# Altium PCB pcb.PcbDoc
Units mm, origin at the board's own origin, x right, y up, seen from the top; angles counter-clockwise.
Board outline 37.5 x 37.5 mm, 2 copper layers (Top Layer, Bottom Layer); 65 components, 72 nets, 249 pads, 78 vias.
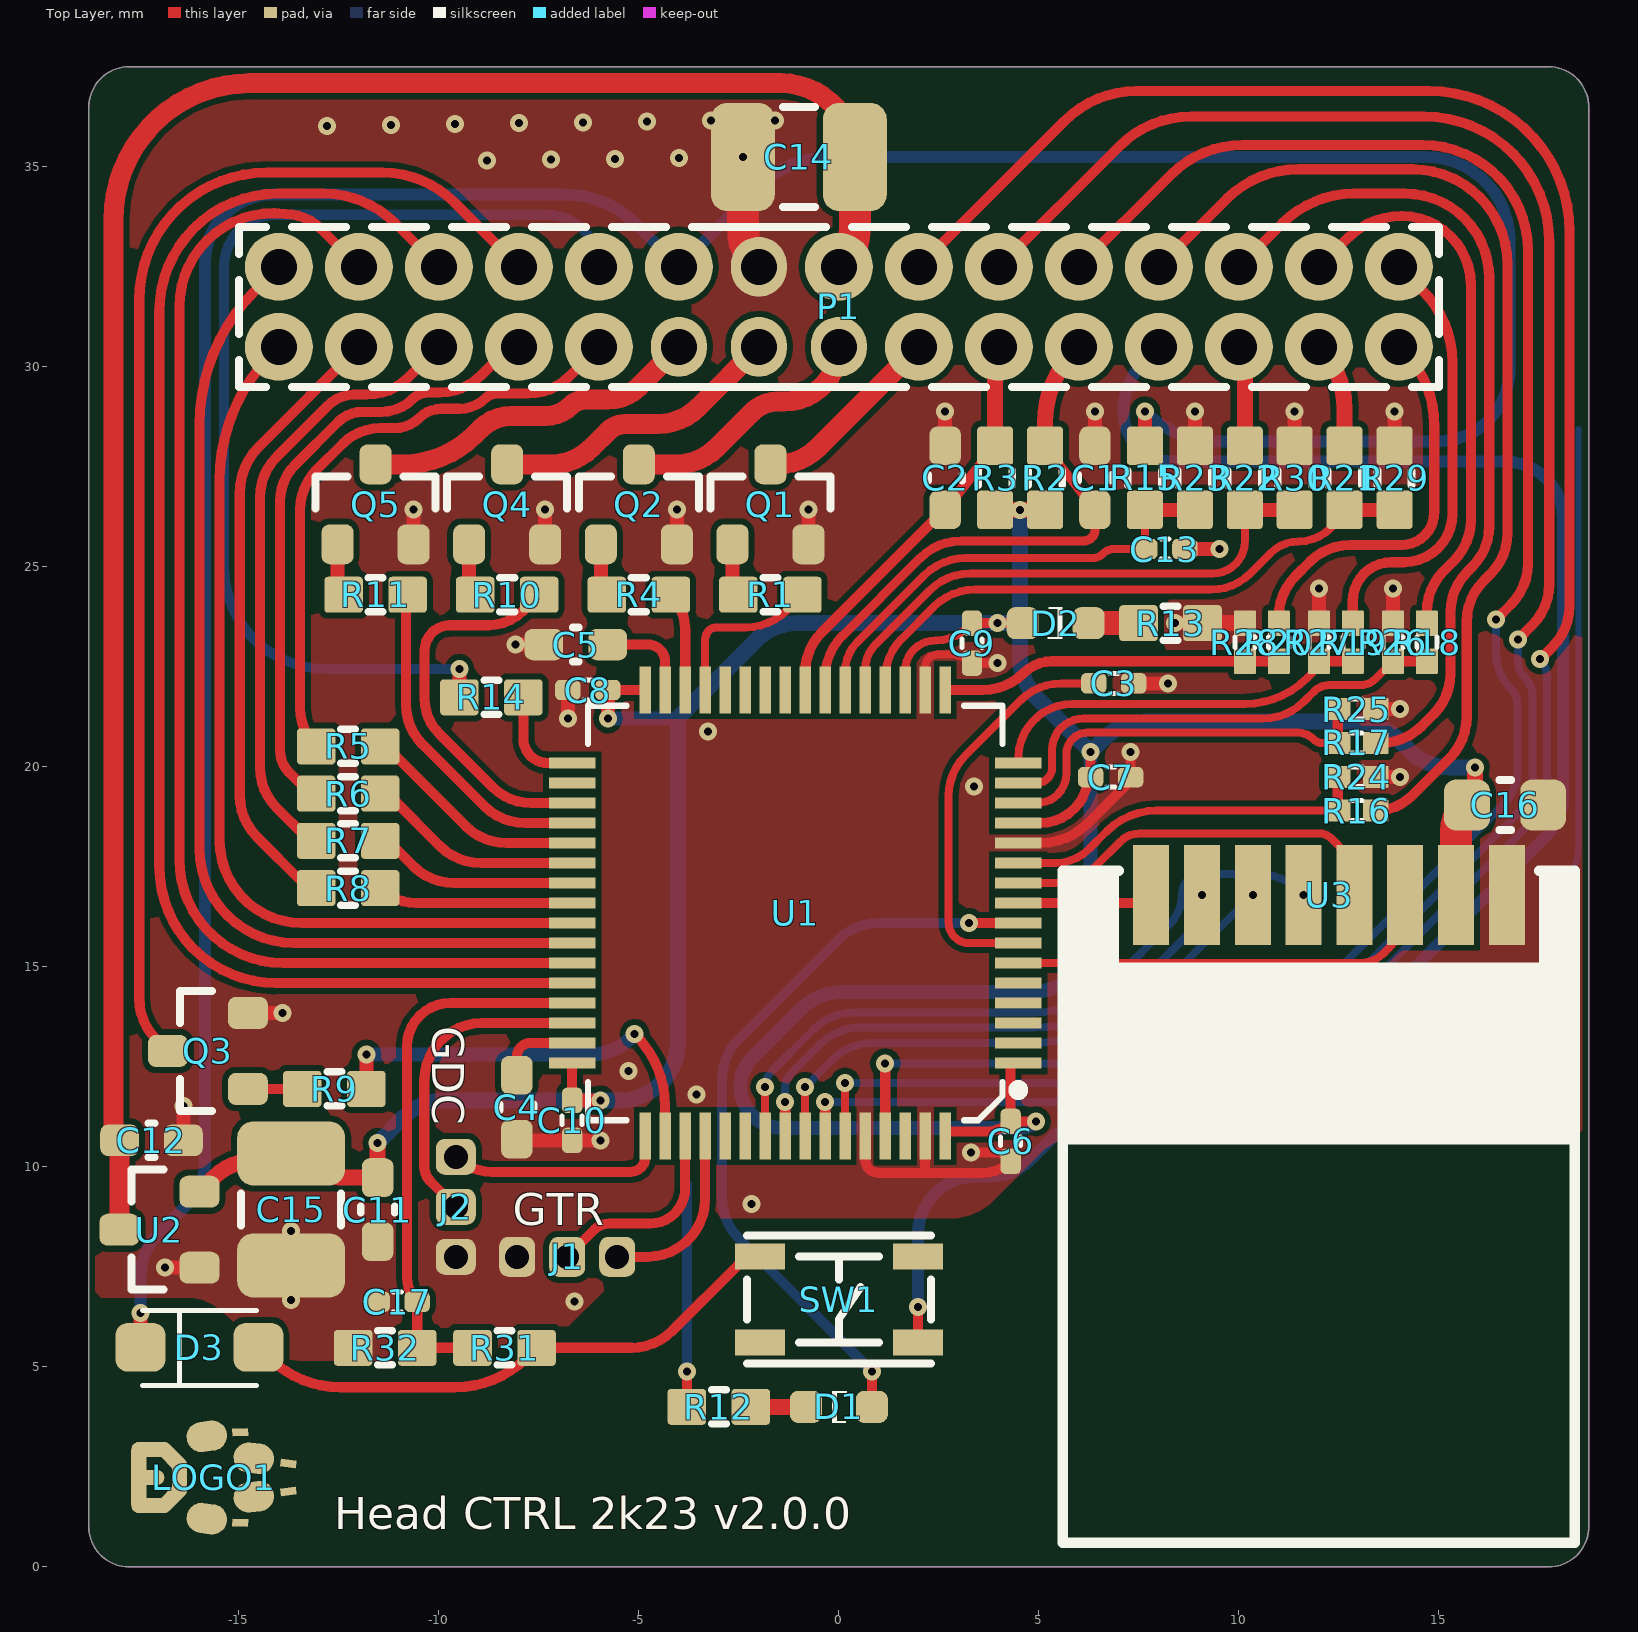
[diagram p0: Top Layer view]
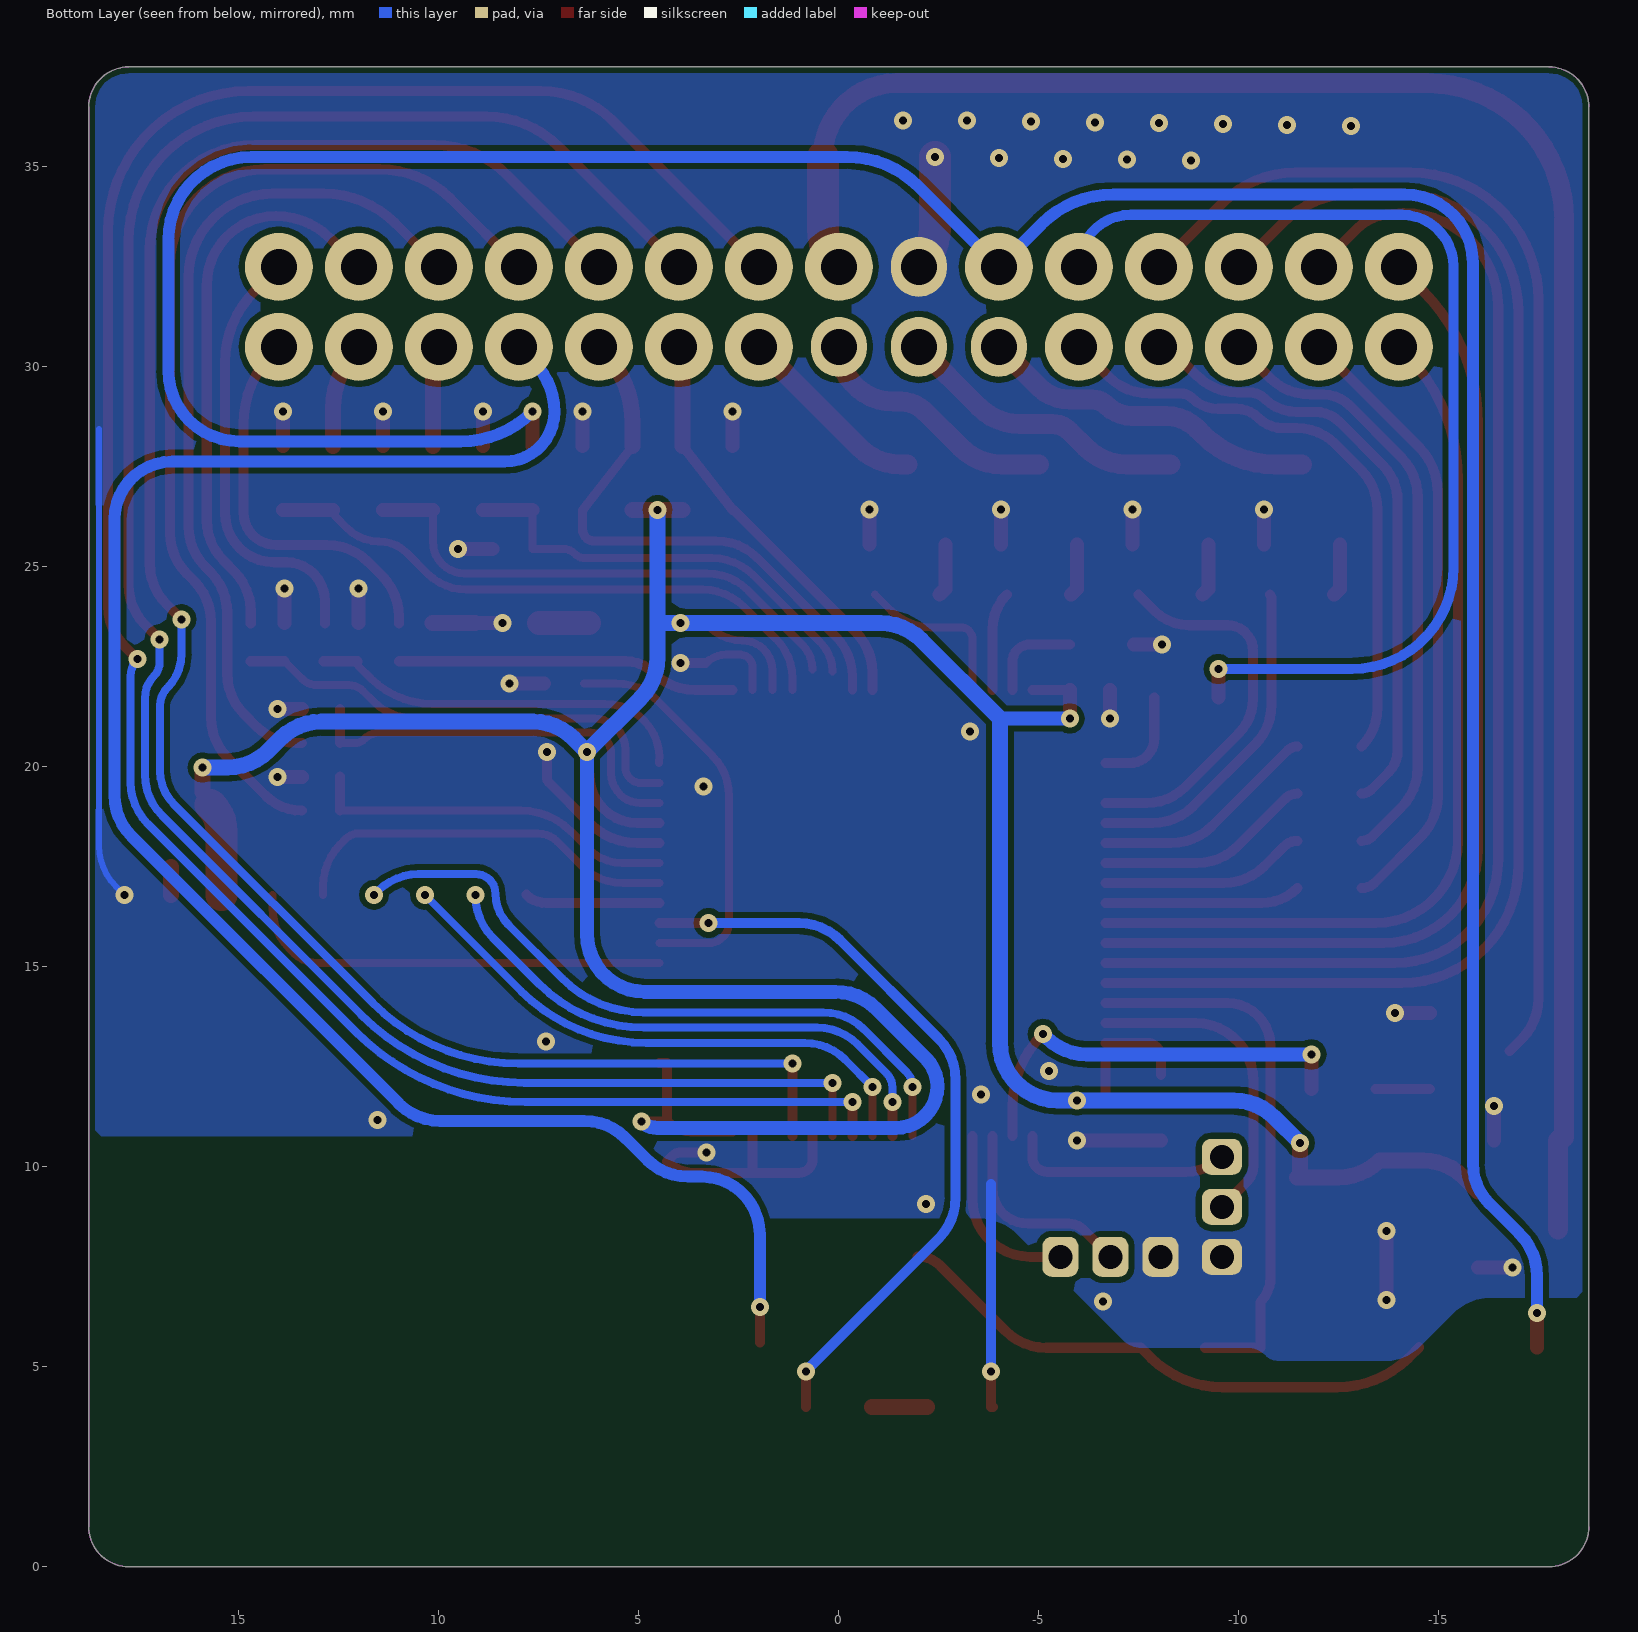
[diagram p1: Bottom Layer view, seen from below]
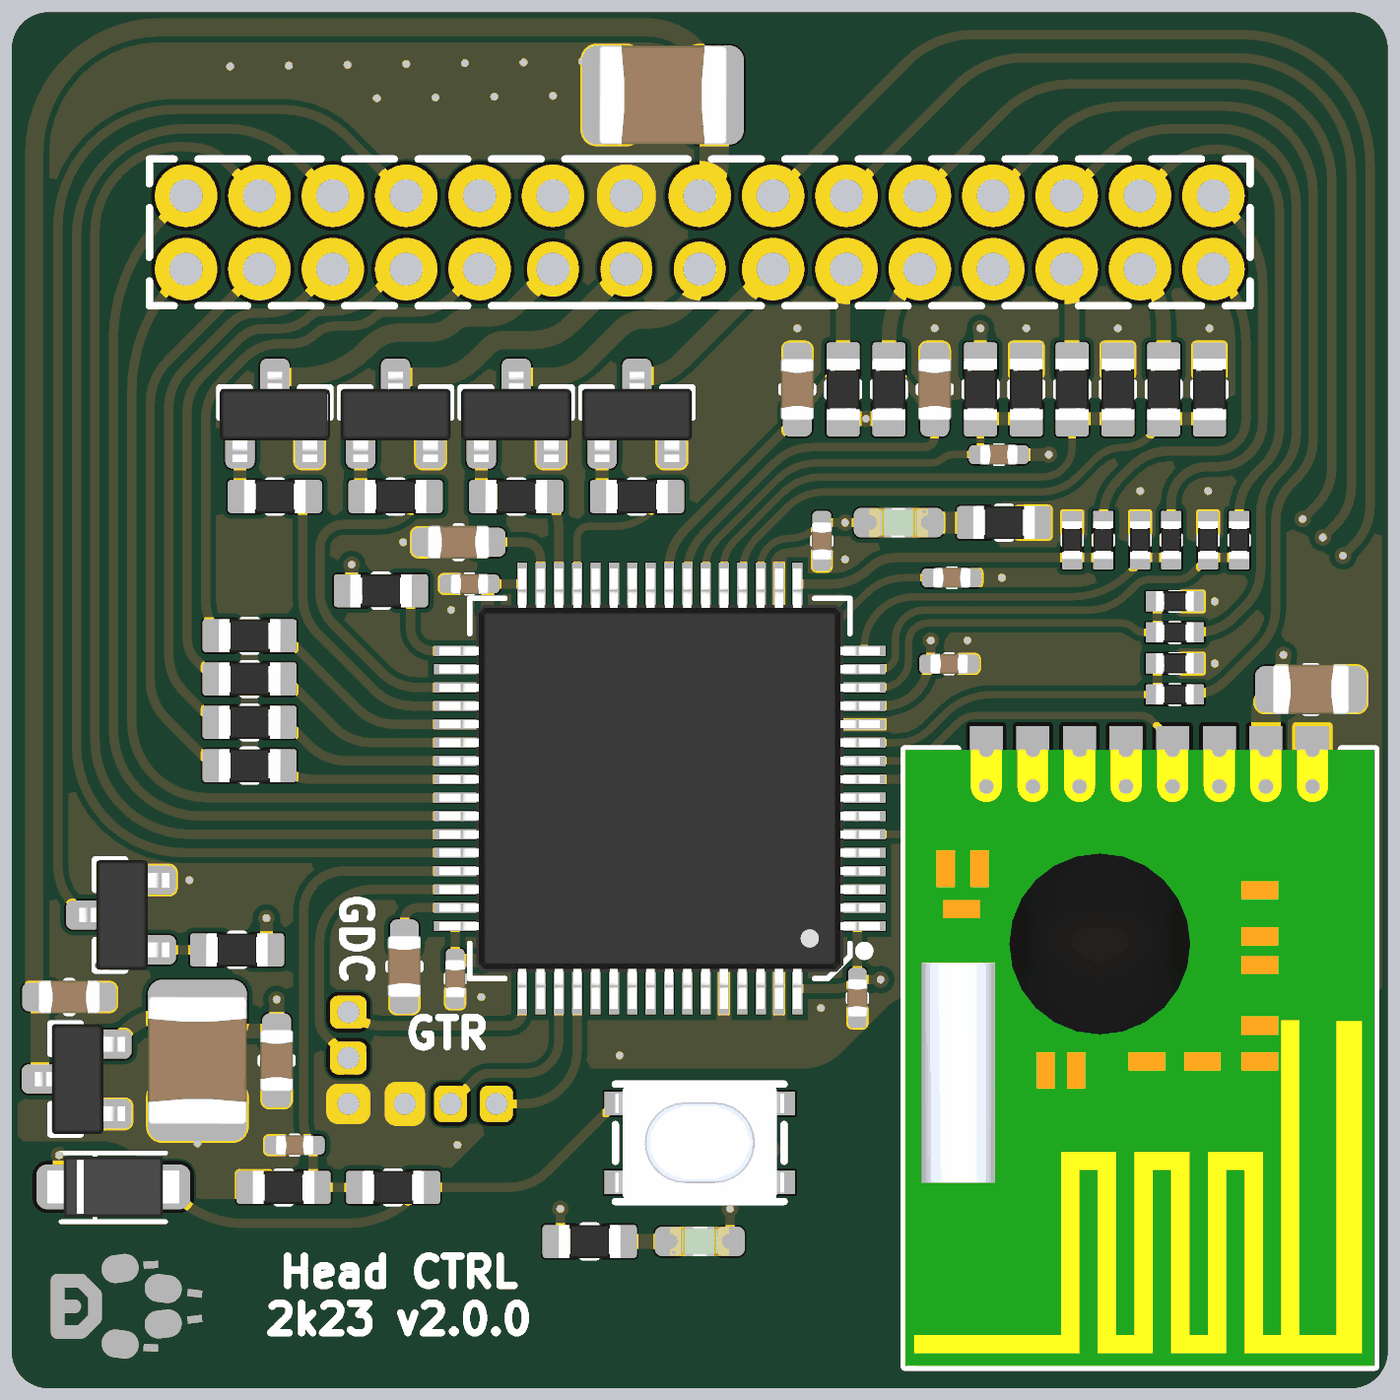
[diagram p2: 3D render of the assembled board from above, using the file's embedded part models]

## Layer stack, top to bottom
Top Solder: solder mask 0.0102, Solder Resist, Dk 3.5
Top Layer: signal copper 0.0356
Dielectric 1: dielectric 0.32, FR-4, Dk 4.8
Bottom Layer: signal copper 0.0356
Bottom Solder: solder mask 0.0102, Solder Resist, Dk 3.5

## Board outline
-18.75,1 ccw(c-17.75,1) -17.75,0 17.749,0 ccw(c17.749,1) 18.75,1 18.75,36.499 ccw(c17.749,36.499) 17.749,37.499 -17.75,37.5 -17.75,37.499 ccw(c-17.75,36.499) -18.75,36.499

## Design rules (kind name [scope] priority, off if disabled: settings)
Clearance Clearance_1 [InNet('ANT')] p1: gap=0.203 ignorepadtopadclearanceinfootprint=FALSE except(0.7: Arc-Fill Arc-Poly Arc-Region Track-Fill Track-Poly Track-Region SMDPad-Fill SMDPad-Poly SMDPad-Region THPad-Fill THPad-Poly THPad-Region Via-Fill Via-Poly Via-Region Fill-Fill Fill-Poly Fill-Region Poly-Poly Poly-Region Region-Region)
Clearance [All] p2: gap=0.15 ignorepadtopadclearanceinfootprint=FALSE
MinimumSolderMaskSliver [All] p1 off: minsoldermaskwidth=0.254
PolygonConnect [All] p1: connectstyle=Direct reliefconductorwidth=0.254 reliefentries=4 polygonreliefangle="90 Angle" airgapwidth=0.254
RoutingVias [All] p1 off: holewidth=0.711 width=1.27 viastyle="Through Hole" minholewidth=0.711 minwidth=1.27 maxholewidth=0.711 maxwidth=1.27
SilkToSolderMaskClearance [IsPad] p1 off: minsilkscreentomaskgap=0.254 clearancetoexposedcopper=TRUE
SolderMaskExpansion [All] p1: expansion=0.102 istentingtop=FALSE
Width [All] p1: maxlimit=12.7 minlimit=0.051 preferedwidth=0.254
28 further rules are at their usual default settings.

## Components (designator, comment, footprint, x,y, rotation, side; value= is the part's Value field where it differs from the comment)
C1 "100n" C0603 6.404,27.223 r270 top
C2 "100n" C0603 2.66,27.223 r270 top
C3 "100n" C0402 6.87,22.088 r180 top
C4 "2.2u" C0603 -8.05,11.493 r90 top
C5 "2.2u" C0603 -6.574,23.057 r0 top
C6 "100n" C0402 4.297,10.637 r90 top
C7 "100n" C0402 6.797,19.742 r180 top
C8 "100n" C0402 -6.274,21.92 r0 top
C9 "100n" C0402 3.327,23.091 r90 top
C10 "100n" C0402 -6.665,11.161 r90 top
C11 "1u" C0603 -11.53,8.932 r90 top
C12 "1u" C0603 -17.183,10.662 r180 top
C13 "100n" C0402 8.152,25.445 r180 top
C14 "1u" C1210 -1,35.246 r0 top
C15 "10u" C1210 -13.691,8.935 r90 top
C16 "10uF" C0805 16.657,19.046 r180 top
C17 "100n" C0402 -11.041,6.623 r0 top
D1 "GRN" LED-0603-GRN 0,4 r0 top
D2 "GRN" LED-0603-GRN 5.422,23.591 r180 top
D3 "DS1M" SOD-123FL -15.983,5.488 r180 top
J1 "UART" HDR-1x3-P1.25 -6.79,7.75 r180 top
J2 "SWD" HDR-1x3-P1.25 -9.576,9 r270 top
LOGO1 "LOGO" LOGO -17.5,2.233 r270 top
P1 "Header 15X2" HDR2X15-2mm 0,31.5 r180 top
Q1 "IRLML2502" SOT-23 -1.711,26.563 r270 top
Q2 "IRLML2502" SOT-23 -5.001,26.563 r270 top
Q3 "IRLML2502" SOT-23 -15.773,12.897 r0 top
Q4 "IRLML2502" SOT-23 -8.29,26.563 r270 top
Q5 "IRLML2502" SOT-23 -11.58,26.563 r270 top
R1 "1k" R0603 -1.711,24.302 r0 top
R2 "10k" R0603 5.156,27.223 r270 top
R3 "10k" R0603 3.908,27.223 r270 top
R4 "1k" R0603 -5.001,24.302 r0 top
R5 "10k" R0603 -12.268,20.51 r180 top
R6 "10k" R0603 -12.268,19.33 r180 top
R7 "10k" R0603 -12.268,18.149 r180 top
R8 "10k" R0603 -12.268,16.969 r180 top
R9 "1k" R0603 -12.611,11.947 r0 top
R10 "1k" R0603 -8.29,24.302 r0 top
R11 "1k" R0603 -11.58,24.302 r0 top
R12 "330" R0603 -3,4 r0 top
R13 "1k" R0603 8.293,23.591 r180 top
R14 "1k" R0603 -8.687,21.736 r180 top
R15 "47k" R0603 7.652,27.223 r90 top
R16 "47k" R0402 12.949,18.905 r0 top
R17 "47k" R0402 12.949,20.597 r0 top
R18 "47k" R0402 14.7,23.115 r90 top
R19 "47k" R0402 12.849,23.115 r90 top
R20 "47k" R0402 10.999,23.115 r90 top
R21 "47k" R0603 12.645,27.223 r90 top
R22 "47k" R0603 10.148,27.223 r90 top
R23 "10k" R0603 8.9,27.223 r270 top
R24 "10k" R0402 12.949,19.751 r180 top
R25 "10k" R0402 12.949,21.443 r180 top
R26 "10k" R0402 13.854,23.115 r270 top
R27 "10k" R0402 12.003,23.115 r270 top
R28 "10k" R0402 10.152,23.115 r270 top
R29 "10k" R0603 13.893,27.223 r270 top
R30 "10k" R0603 11.397,27.223 r270 top
R31 "30k" R0603 -8.357,5.475 r0 top
R32 "22k" R0603 -11.341,5.475 r0 top
SW1 "PTS810SJS250" BTN_PTS810 0,6.686 r0 top
U1 "STM32F405RGT6" LQFP-64 -1.09,16.345 r90 top
U2 "XC6206P332MR" SOT-23 -16.983,8.427 r0 top
U3 "RFM75" RFM75 12,9 r180 top

## Footprints (in the part's own frame and the unit in brackets; to place one, negate y for a bottom-side part, rotate by r counter-clockwise, add the part's x,y. Pads: shape width x height; smd on the part's side, far side on the other; paste and mask are expansions set on the pad)
BTN_PTS810 [mm]
  rect 1.25x0.65 smd mask+0.05: 1(-1.975,1.075) 2(1.975,1.075) 3(-1.975,-1.075) 4(1.975,-1.075)
  silkscreen extent -2.3,-1.6 2.3,1.6, body extent -2.3,-1.6 2.3,1.6, height 2.5
C0402 [mm] "Chip Capacitor Body"
  rrect50% 0.635x0.508 smd mask+0.05: 1(-0.5,0) 2(0.5,0)
  silkscreen extent -0.1,-0.25 0.1,0.25, body extent -0.52,-0.27 0.53,0.28, height 0.55
C0603 [mil] "Chip Capacitor"
  rrect50% 38x31 smd mask+1.97: 1(-31.5,0) 2(31.5,0)
  silkscreen extent -3,-17 3,17, body extent -33,-18 33,18, height 35
C0805 [mil] "Chip Capacitor"
  rrect50% 45x50 smd mask+1.97: 1(-37.5,0) 2(37.5,0)
  silkscreen extent -6,-25 6,25, body extent -41,-27 41,27, height 53
C1210 [mm] "Chip Capacitor"
  rrect50% 1.6x2.7 smd mask+0.05: 1(-1.4,0) 2(1.4,0)
  silkscreen extent -0.4,-1.25 0.4,1.25, body extent -1.75,-1.35 1.75,1.35, height 1.8
HDR2X15-2mm [mm] "Connector; Header; 30x2 Position"
  round 1.7 hole 0.9: 1(-14,-1) 2(-14,1) 3(-12,-1) 4(-12,1) 5(-10,-1) 6(-10,1) 7(-8,-1) 8(-8,1) 9(-6,-1) 10(-6,1) 11(-4,-1) 12(-4,1) 13(-2,-1) 14(-2,1) 15(0,-1) 19(4,-1) 21(6,-1) 22(6,1) 23(8,-1) 24(8,1) 25(10,-1) 26(10,1) 27(12,-1) 28(12,1) 29(14,-1) 30(14,1)
  oval 1.4x1.5 hole 0.9: 16(0,1) 17(2,-1) 18(2,1) 20(4,1)
  silkscreen extent -15,-2 15,2
HDR-1x3-P1.25 [mm]
  rrect50% 0.9x1 hole 0.6: 1(-1.25,0) 2(0,0) 3(1.25,0)
LED-0603-GRN [mm]
  rrect50% 0.8x0.8 smd mask+0.05: 1(0.825,0) 2(-0.825,0)
  silkscreen extent -0.18,-0.4 0.2,0.4, body extent -0.8,-0.4 0.8,0.4, height 0.6
LOGO [mil]
  rect 15.75x7.87 smd rot 93 mask+4: ""(-44.55,100)
  oval 30x40 smd rot 8 mask+4: ""(-40.55,67)
  oval 15x39.5 smd mask+4: ""(-27.5,12.5) ""(27.5,12.5)
  oval 15x36.21 smd rot 135 mask+4: ""(-20,32.5)
  oval 30x40 smd rot 173 mask+4: ""(-18.99,113.27)
  rect 15.75x7.87 smd rot 83 mask+4: ""(-13.91,147.15)
  oval 39.5x15 smd mask+4: ""(0,40)
  oval 15x32.5 smd mask+4: ""(0,9)
  oval 70x15 smd mask+4: ""(0,0)
  rect 15.75x7.87 smd rot 97 mask+4: ""(13.91,147.15)
  oval 30x40 smd rot 7 mask+4: ""(18.99,113.27)
  oval 15x36.21 smd rot 45 mask+4: ""(20,32.5)
  oval 30x40 smd rot 172 mask+4: ""(40.55,67)
  rect 15.75x7.87 smd rot 87 mask+4: ""(44.55,100)
LQFP-64 [mil]
  rect 11x46 smd mask+0.98: 1(-147.64,-219.5) 2(-127.95,-219.5) 3(-108.27,-219.5) 4(-88.58,-219.5) 5(-68.9,-219.5) 6(-49.21,-219.5) 7(-29.53,-219.5) 8(-9.84,-219.5) 9(9.84,-219.5) 10(29.53,-219.5) 11(49.21,-219.5) 12(68.9,-219.5) 13(88.58,-219.5) 14(108.27,-219.5) 15(127.95,-219.5) 16(147.64,-219.5) 33(147.64,219.5) 34(127.95,219.5) 35(108.27,219.5) 36(88.58,219.5) 37(68.9,219.5) 38(49.21,219.5) 39(29.53,219.5) 40(9.84,219.5) 41(-9.84,219.5) 42(-29.53,219.5) 43(-49.21,219.5) 44(-68.9,219.5) 45(-88.58,219.5) 46(-108.27,219.5) 47(-127.95,219.5) 48(-147.64,219.5)
  rect 46x11 smd mask+0.98: 17(219.5,-147.64) 18(219.5,-127.95) 19(219.5,-108.27) 20(219.5,-88.58) 21(219.5,-68.9) 22(219.5,-49.21) 23(219.5,-29.53) 24(219.5,-9.84) 25(219.5,9.84) 26(219.5,29.53) 27(219.5,49.21) 28(219.5,68.9) 29(219.5,88.58) 30(219.5,108.27) 31(219.5,127.95) 32(219.5,147.64) 49(-219.5,147.64) 50(-219.5,127.95) 51(-219.5,108.27) 52(-219.5,88.58) 53(-219.5,68.9) 54(-219.5,49.21) 55(-219.5,29.53) 56(-219.5,9.84) 57(-219.5,-9.84) 58(-219.5,-29.53) 59(-219.5,-49.21) 60(-219.5,-68.9) 61(-219.5,-88.58) 62(-219.5,-108.27) 63(-219.5,-127.95) 64(-219.5,-147.64)
  silkscreen extent -204,-224 204,204, body extent -236,-236 236,236, height 59
R0402 [mm]
  rrect10% 0.635x0.55 smd mask+0.05: 1(-0.476,0) 2(0.476,0)
  silkscreen extent -0.12,-0.25 0.13,0.25, body extent -0.52,-0.27 0.53,0.28, height 0.4
R0603 [mil] "Chip Resistor; Body 1.6 x 0.8 mm (LxW typ)"
  rrect20% 38x35.43 smd mask+1.97: 1(-31.5,0) 2(31.5,0)
  silkscreen extent -7,-17 7,17, body extent -33,-18 33,18, height 22
RFM75 [mm]
  rect 0.9x2.5 smd: 1(-4.7,-7.8) 2(-3.43,-7.8) 3(-2.16,-7.8) 4(-0.89,-7.8) 5(0.38,-7.8) 6(1.65,-7.8) 7(2.92,-7.8) 8(4.19,-7.8)
  silkscreen extent -6.4,-8.4 6.4,8.4, body extent -6.4,-8.4 6.4,8.4, height 3.01
SOD-123FL [mm]
  rrect50% 1.25x1.22 smd: 1(-1.475,0) 2(1.475,0)
  silkscreen extent -1.43,-0.92 1.43,0.95, body extent -1.8,-0.83 1.8,0.82, height 0.95
SOT-23 [mm]
  rrect50% 1x0.8 smd mask+0.05: 1(1,-0.95) 2(1,0.95) 3(-1,0)
  silkscreen extent -0.7,-1.5 0.1,1.5, body extent -1.27,-1.5 1.33,1.5, height 1.1

## Part data
C1 C2 C3 C4 C5 C6 C7 C8 C9 C10 C11 C12 C13 C14 C15 C17: library part Cap
C16: library part CAP
D1 D2: library part LED-0603-GREEN, "LED 0603 GRN", LCSC part number=C434420, P/N=SZYY0603G
D3: library part US1M-13-F
J1 J2: library part "Header 3"
P1: "Header, 15-Pin, Dual row"
Q1 Q2 Q3 Q4 Q5: "MOSFET N-CH 20V 4.2A SOT-23-3"
R1 R2 R3 R4 R5 R6 R7 R8 R9 R10 R11 R12 R13 R14 R15 R16 R17 R18 R19 R20 R21 R22 R23 R24 R25 R26 R27 R28 R29 R30 R31 R32: library part Res1
SW1: library part Component_1, LCSC part number=C221896, P/N=PTS810SJK250SMTRLFS
U1: "MCU STM32F405RGT6", P/N=STM32F405RGT6
U2: library part Component_4_1, LCSC part number=C347376, P/N=XC6206P332MR

## Via types
v1: diameter 0.45, hole 0.2, Top Layer to Bottom Layer, tented both sides, 78 vias

## Nets (pads, with @x,y where several pads share a name; then routed paths per layer and width w, separated by ;. In a path a pad name is that pad's centre, name@x,y a point inside that pad or via, vN(x,y) a via of type N, cw(c..) or ccw(c..) an arc to the next point about the centre after c; other vN are vias at no path point)
3V3: C6.2 C7.2 C8.2 C9.2 C10.2 C11.2 C15.2 C16.2 D2.1 R2.2 R3.2 U1.1 U1.13 U1.19 U1.32 U1.48 U1.64 U2.2 U3.2 | length 92.5
  Top Layer w0.2: U1.19 1.66,22.406 cw(c2.413,22.406) 2.413,23.159 ccw(c2.413,24.324) 3.237,23.5 C9.2
  Top Layer w0.25: C10.2 U1.48 ; C8.2 U1.32 ; U1.64@2.66,10.887 3.693,10.887 ccw(c3.693,11.74) C6.2 ; C9.2 v1(3.962,23.591) D2.1 ; U1.1 4.297,12.595 C6.2 ; U1.13 5.029,18.595 ccw(c5.029,19.804) C7.2@6.238,19.804 ; v1(4.932,11.137) C6.2 ; C7.2 v1(6.297,20.377)
  Top Layer w0.35: C10.2 v1(-5.954,11.661) ; v1(-5.774,21.209) C8.2
  Top Layer w0.4: U2.2 -15.625,9.735 cw(c-14.601,8.711) -14.601,10.159 -13.515,10.159 ccw(c-12.491,11.183) -12.491,9.735 C11.2@-11.455,9.735 ; C11.2 v1(-11.53,10.595) ; R3.2 v1(4.532,26.423) R2.2 ; C16.2@15.908,19.376 v1(15.908,19.986)
  Top Layer w0.8: U3.2 15.43,18.383 cw(c16.368,18.383) C16.2
  Bottom Layer w0.35: v1(-5.774,21.209) -4.025,21.209 ; v1(4.932,11.137) cw(c4.536,11.532) 4.536,10.973 -1.422,10.973 cw(c-1.422,12.014) -2.464,12.014 cw(c-1.483,12.014) -2.176,12.708 -0.932,13.952 cw(c0.092,12.929) 0.092,14.376 4.849,14.376 ccw(c4.849,15.824) 6.297,15.824 v1(6.297,20.377)
  Bottom Layer w0.4: v1(-11.53,10.595) -10.889,11.237 cw(c-9.865,10.213) -9.865,11.661 v1(-5.954,11.661) -5.472,11.661 ccw(c-5.472,13.109) -4.025,13.109 -4.025,21.209 -2.067,23.167 cw(c-1.043,22.143) -1.043,23.591 v1(3.962,23.591) 4.532,23.591 ; v1(4.532,26.423) 4.532,22.741 ccw(c5.98,22.741) 4.956,21.717 v1(6.297,20.377) 6.623,20.703 cw(c7.647,19.679) 7.647,21.127 12.939,21.127 cw(c12.939,19.679) 13.962,20.703 14.255,20.41 ccw(c15.279,21.434) 15.279,19.986 v1(15.908,19.986)
5V: C12.2 C14.2 P1.15 U2.3 | length 50.3
  Top Layer w0.254: P1.15@0.055,32.026 P1.15@0.055,32.5
  Top Layer w0.5: C12.2@-18.136,10.738 C12.2@-18.136,10.814 ; U2.3 C12.2 C12.2@-18.136,10.814 ; C14.2 ccw(c-1.444,35.246) -1.444,37.09 -14.718,37.09 ccw(c-14.718,33.673) -18.136,33.673 C12.2@-18.136,10.814
  Top Layer w0.8: P1.15 ccw(c-0.966,33.466) 0.055,32.558 ccw(c-0.966,33.466) 0.4,33.466 C14.2
_FAN0: P1.18 Q4.3 | length 7.4
  Top Layer w0.5: Q4.3 -7.193,27.563 ccw(c-7.193,29.011) -6.17,27.987 -5.766,28.391 cw(c-5.337,27.962) -5.337,28.569 -4.531,28.569 ccw(c-4.531,30.017) -3.507,28.993 P1.18
_FAN1: P1.20 Q5.3 | length 8.5
  Top Layer w0.5: Q5.3 -10.897,27.563 ccw(c-10.897,30.103) -9.101,28.307 -8.959,28.449 cw(c-8.179,27.668) -8.179,28.772 -7.319,28.772 ccw(c-7.319,29.639) -6.706,29.026 cw(c-6.338,28.658) -6.338,29.179 -5.776,29.179 ccw(c-5.776,30.276) -5,29.5 P1.20
_LED0: P1.14 Q1.3 | length 5.1
  Top Layer w0.5: Q1.3 -1.536,27.563 ccw(c-1.536,29.011) -0.513,27.987 P1.14 P1.14@2,30.294
_LED1: P1.16 Q2.3 | length 6.3
  Top Layer w0.5: Q2.3 -4.069,27.563 ccw(c-4.069,29.011) -3.045,27.987 -2.156,28.876 cw(c-1.549,28.269) -1.549,29.128 -1.372,29.128 ccw(c-1.372,30.5) 0,30.485 ccw(c-1.372,30.5) P1.16
_LED2: P1.23 Q3.3 | length 31.2
  Top Layer w0.254: Q3.3 -17.067,13.191 cw(c-16.043,14.214) -17.491,14.214 -17.491,31.668 cw(c-14.304,31.668) -14.304,34.855 -11.407,34.855 cw(c-11.407,32.315) -9.611,34.111 P1.23
_SAIN0: P1.7 R16.2 | length 26.1
  Top Layer w0.254: P1.7 9.694,34.194 cw(c11.491,32.398) 11.491,34.938 14.338,34.938 cw(c14.338,32.557) 16.719,32.557 16.719,25.847 cw(c15.272,25.847) 16.295,24.824 16.121,24.65 ccw(c17.145,23.626) 15.697,23.626 15.697,21.244 cw(c14.249,21.244) 15.273,20.22 14.335,19.282 cw(c13.425,20.192) R16.2
_SAIN1: P1.5 R17.2 | length 21.1
  Top Layer w0.254: P1.5 11.085,33.585 cw(c12.881,31.789) 12.881,34.329 14.158,34.329 cw(c14.158,32.227) 16.261,32.227 16.261,26.024 cw(c14.813,26.024) 15.836,25 15.715,24.878 ccw(c16.739,23.855) 15.291,23.855 15.291,22.336 cw(c13.843,22.336) 14.867,21.312 14.576,21.021 cw(c13.552,22.045) 13.552,20.597 R17.2
_SAIN2: P1.3 R18.2 | length 14
  Top Layer w0.254: P1.3 12.703,33.203 cw(c14.071,31.835) 14.071,33.77 cw(c14.071,32.04) 15.802,32.04 15.802,26.174 cw(c14.354,26.174) 15.378,25.151 15.124,24.897 ccw(c16.148,23.873) 14.7,23.873 R18.2
_SAIN3: P1.1 R19.2 | length 10.9
  Top Layer w0.254: R19.2 12.849,24.148 cw(c13.816,24.148) 13.816,25.115 14.124,25.115 ccw(c14.124,26.334) 15.343,26.334 15.343,30.105 ccw(c12.803,30.105) 14.599,31.901 P1.1
_SAIN4: P1.2 R20.2 | length 9.9
  Top Layer w0.254: R20.2 10.999,23.753 cw(c12.446,23.753) 11.423,24.777 11.768,25.122 cw(c12.792,24.099) 12.792,25.546 14.072,25.546 ccw(c14.072,26.359) 14.884,26.359 14.884,28.569 ccw(c12.356,28.569) 14.144,30.356 P1.2
_SAIN5: P1.4 R21.2 | length 3.1
  Top Layer w0.254: P1.4@12,30.016 P1.4
  Top Layer w0.4: P1.4 cw(c10.444,28.944) 12.645,28.944 R21.2
_SAIN6: P1.6 R22.2 | length 2.7
  Top Layer w0.254: P1.6@10,30.353 P1.6
  Top Layer w0.4: P1.6 cw(c9.642,30.142) 10.148,30.142 R22.2
ADC0: R16.1 R24.2 U1.11 | length 9.2
  Top Layer w0.2: U1.11 5.414,17.595 ccw(c5.414,18.782) 6.253,17.942 6.699,18.388 cw(c7.947,17.14) 7.947,18.905 R16.1
  Top Layer w0.254: R16.1 R24.2
ADC1: R17.1 R25.2 U1.14 | length 10.1
  Top Layer w0.2: U1.14 4.953,19.095 ccw(c4.953,19.831) 5.69,19.831 5.69,20.324 cw(c6.219,20.324) 6.219,20.853 11.481,20.853 cw(c11.481,20.314) 11.862,20.695 ccw(c12.098,20.931) 12.098,20.597 R17.1
  Top Layer w0.254: R17.1 R25.2
ADC2: R18.1 R26.2 U1.15 | length 11.8
  Top Layer w0.2: U1.15 4.945,19.595 ccw(c4.945,19.984) 5.069,19.615 ccw(c4.945,19.984) 5.334,19.984 5.334,20.428 cw(c6.111,20.428) 6.111,21.205 10.604,21.205 ccw(c10.604,22.653) 11.628,21.629 11.887,21.889 cw(c12.255,21.521) 12.255,22.041 13.03,22.041 ccw(c13.03,22.588) 13.417,22.201 R26.2
  Top Layer w0.254: R26.2 R18.1
ADC3: R19.1 R27.2 U1.16 | length 9.7
  Top Layer w0.2: U1.16@4.49,20.095 cw(c5.847,20.211) 5.847,21.573 10.15,21.573 ccw(c10.15,23.779) 11.709,22.219 11.994,22.504 ccw(c11.885,22.613) R27.2@12.04,22.613
  Top Layer w0.254: R27.2@12.04,22.639 R19.1@12.886,22.639
ADC4: R20.1 R28.2 U1.17 | length 8.5
  Top Layer w0.254: U1.17 3.597,21.92 ccw(c3.597,23.368) 4.621,22.344 cw(c5.332,21.633) 5.332,22.639 R28.2 R20.1
ADC5: R21.1 R29.2 U1.20 | length 14.9
  Top Layer w0.2: U1.20 1.16,22.222 cw(c2.522,22.222) 1.559,23.186 2.378,24.005 cw(c3.402,22.981) 3.402,24.429 9.306,24.429 ccw(c9.306,25.816) 10.287,24.835 10.798,25.346 cw(c11.502,24.641) 11.502,25.638 ccw(c11.502,26.756) 12.293,25.965 12.57,26.242 ccw(c12.389,26.423) R21.1
  Top Layer w0.35: R21.1 R29.2
ADC6: R22.1 R30.2 U1.21 | length 13.1
  Top Layer w0.2: U1.21@0.66,22.439 cw(c1.539,22.439) 0.917,23.06 2.268,24.411 cw(c3.292,23.387) 3.292,24.835 9.355,24.835 ccw(c9.355,25.629) 10.148,25.629 R22.1
  Top Layer w0.35: R22.1 R30.2
ADC7: C13.2 R15.1 R23.2 U1.22 | length 11.1
  Top Layer w0.2: U1.22@0.16,22.389 cw(c1.178,22.389) 0.458,23.109 2.141,24.792 cw(c3.165,23.768) 3.165,25.216 6.331,25.216 ccw(c6.331,25.606) 6.607,25.331 cw(c6.883,25.055) 6.883,25.445 C13.2 R15.1
  Top Layer w0.35: R15.1 R23.2
BTN_ON_SNS: C17.2 R31.1 R32.2 U1.45 | length 13.7
  Top Layer w0.254: R31.1 R32.2 C17.2 cw(c-9.926,7.238) -10.796,7.238 -10.796,13.011 cw(c-9.711,13.011) -9.711,14.095 U1.45
BTN_RTN: D3.2 P1.19 R15.2 | length 78.5
  Top Layer w0.35: D3.2 v1(-17.458,6.351) ; R15.2 v1(7.652,28.886)
  Bottom Layer w0.3: v1(-17.458,6.351) -17.458,7.269 cw(c-15.965,7.269) -17.021,8.326 -16.26,9.086 ccw(c-17.252,10.077) -15.85,10.077 -15.85,32.608 cw(c-14.148,32.608) -14.148,34.309 -6.862,34.309 cw(c-6.862,31.769) -5.065,33.565 P1.19 -1.995,34.505 cw(c-0.199,32.709) -0.199,35.249 14.681,35.249 cw(c14.681,33.166) 16.764,33.166 16.764,29.915 cw(c14.986,29.915) 14.986,28.137 9.454,28.137 cw(c9.454,30.677) 7.658,28.881 v1(7.652,28.886)
C\S\: U1.10 U3.4 | length 9.9
  Top Layer w0.2: U1.10 5.401,17.095 ccw(c5.401,18.543) 6.425,17.519 7.041,18.135 cw(c7.518,17.658) 7.518,18.333 12.012,18.333 cw(c12.012,17.899) 12.319,18.206 12.466,18.059 cw(c11.442,17.035) 12.89,17.035 U3.4
CE: U1.6 U3.3 | length 10.8
  Top Layer w0.2: U1.6 13.033,15.095 ccw(c13.033,15.917) 13.614,15.336 13.736,15.457 ccw(c12.712,16.481) 14.16,16.481 U3.3
FAN0: R10.2 U1.35 | length 9.6
  Top Layer w0.254: R10.2 -7.891,23.901 cw(c-8.763,24.773) -8.763,23.54 -9.719,23.54 ccw(c-9.719,22.905) -10.354,22.905 -10.354,21.704 ccw(c-9.118,21.704) -9.992,20.83 -8.653,19.491 ccw(c-7.696,20.447) -7.696,19.095 U1.35
FAN1: R11.2 U1.36 | length 8.4
  Top Layer w0.254: R11.2 ccw(c-10.682,24.204) -10.82,24.204 -10.82,21.559 ccw(c-9.41,21.559) -10.407,20.561 -8.865,19.019 ccw(c-7.841,20.043) -7.841,18.595 U1.36
GND: C1.1 C2.1 C3.1 C4.1 C5.1 C6.1 C7.1 C8.1 C9.1 C10.1 C11.1 C12.1 C13.1 C14.1 C15.1 C16.1 C17.1 J1.3 J2.3 P1.17 Q1.2 Q2.2 Q3.2 Q4.2 Q5.2 R12.1 R13.1 R23.1 R24.1 R25.1 R26.1 R27.1 R28.1 R29.1 R30.1 R32.1 U1.12 U1.18 U1.60 U1.63 U2.1 U3.1 | length 56.2
  Top Layer w0.2: U1.18 2.16,22.499 cw(c2.464,22.499) 2.464,22.803 2.814,22.803 cw(c2.814,22.077) C9.1
  Top Layer w0.25: R12.1 v1(-3.8,4.889) ; U1.60 0.66,10.18 ccw(c0.991,10.18) 0.991,9.849 2.16,9.849 ; U1.63 2.16,9.849 ; v1(3.302,10.363) 3.937,10.363 cw(c3.937,10.042) 4.164,10.269 C6.1 cw(c3.603,10.83) 3.603,9.849 2.16,9.849 ; C9.1 v1(3.962,22.591) ; U1.12 5.029,18.095 ccw(c5.029,19.804) 6.238,18.595 7.235,19.592 ccw(c7.085,19.742) C7.1 v1(7.297,20.377)
  Top Layer w0.35: v1(-16.847,7.477) U2.1 ; C12.1 v1(-16.383,11.526) ; Q3.2 v1(-13.91,13.847) ; v1(-13.691,6.671) C15.1 v1(-13.691,8.398) ; Q5.2 v1(-10.63,26.427) ; v1(-8.085,23.057) C5.1 ; C4.1@-8.05,10.661 C10.1 v1(-5.954,10.661) ; Q4.2 v1(-7.34,26.427) ; v1(-6.774,21.209) C8.1 ; Q2.2 v1(-4.051,26.427) ; Q1.2 v1(-0.761,26.427) ; C2.1 v1(2.66,28.886) ; C1.1 v1(6.404,28.886) ; C3.1 v1(8.234,22.088) ; v1(8.407,23.591) R13.1 ; C13.1 v1(9.516,25.445) ; R23.1 v1(8.9,28.886) ; R30.1 v1(11.397,28.886) ; R27.1 v1(12.004,24.454) ; R24.1 v1(14.035,19.751) ; R25.1 v1(14.035,21.443) ; R26.1 v1(13.854,24.454) ; R29.1 v1(13.893,28.886)
  Top Layer w0.4: R13.1 R28.1 ; U3.1 U3.1@16.7,17.5
  Top Layer w0.8: v1(-2.4,35.246) -2.4,33.466 ccw(c-1.034,33.466) P1.17
  Bottom Layer w0.15: v1(17.856,16.789) 18.067,17 ccw(c17.043,18.024) 18.491,18.024 18.491,28.449
  Bottom Layer w0.25: v1(-3.8,4.889) -3.8,9.576
  other v1: -6.604,6.629 -2.184,9.068 11.532,11.176 -3.556,11.811 -5.258,12.395 7.315,13.132 3.378,19.507 -3.277,20.879 -8.8,35.157 -7.2,35.179 -5.6,35.202 -4,35.224 -12.8,36.024 -11.2,36.046 -9.6,36.068 -8,36.091 -6.4,36.113 -4.8,36.135 -3.2,36.157 -1.6,36.157
I\R\Q\: U1.9 U3.8 | length 3.4
  Top Layer w0.254: U1.9 7.315,16.595 ccw(c7.315,17.295) U3.8
LED0: R1.2 U1.29 | length 4.1
  Top Layer w0.2: U1.29 -3.34,23.197 cw(c-3.048,23.197) -3.048,23.489 -2.323,23.489 ccw(c-2.323,24.937) -1.299,23.913 R1.2
LED1: R4.2 U1.30 | length 2.7
  Top Layer w0.254: R4.2@-4.076,24.177 R4.2 cw(c-5.071,23.432) -3.84,23.432 U1.30
LED2: R9.2 U1.50 | length 10.5
  Top Layer w0.25: v1(-5.102,13.319) -5.084,13.301 cw(c-6.88,11.505) -4.34,11.505 U1.50
  Top Layer w0.35: R9.2 v1(-11.811,12.811)
  Bottom Layer w0.35: v1(-11.811,12.811) -6.21,12.811 ccw(c-6.21,14.259) -5.186,13.235 v1(-5.102,13.319)
LED_IND: D1.1 U1.8 | length 18.9
  Top Layer w0.25: D1.1 v1(0.825,4.889)
  Top Layer w0.254: v1(3.256,16.095) U1.8
  Bottom Layer w0.25: v1(0.825,4.889) -2.497,8.211 cw(c-1.473,9.235) -2.921,9.235 -2.921,12.177 cw(c-1.473,12.177) -2.497,13.2 -0.026,15.671 cw(c0.997,14.647) 0.997,16.095 v1(3.256,16.095)
MISO: U1.56 U3.7 | length 13.8
  Top Layer w0.254: U1.56 v1(-1.34,11.618)
  Bottom Layer w0.2: v1(-1.34,11.618) -1.34,11.985 cw(c-0.841,11.985) -1.194,12.338 -0.475,13.057 cw(c0.549,12.034) 0.549,13.481 4.875,13.481 ccw(c4.875,17.164) 7.479,14.56 8.656,15.737 ccw(c7.632,16.76) 9.08,16.76 v1(9.08,16.8)
MOSI: U1.57 U3.6 | length 14.2
  Top Layer w0.2: U1.57 v1(-0.84,11.999)
  Bottom Layer w0.2: v1(-0.84,11.999) -0.163,12.676 cw(c0.861,11.653) 0.861,13.1 4.813,13.1 ccw(c4.813,17.535) 7.949,14.399 v1(10.35,16.8)
NetC4_2: C4.2 U1.47 | length 2
  Top Layer w0.25: C4.2 -8.05,12.754 cw(c-7.709,12.754) -7.709,13.095 U1.47
NetC5_2: C5.2 U1.31 | length 2.4
  Top Layer w0.25: C5.2 -4.775,23.057 cw(c-4.775,22.622) -4.34,22.622 U1.31
NetD1_2: D1.2 R12.2 | length 1.4
  Top Layer w0.4: R12.2 D1.2
NetD2_2: D2.2 R13.2 | length 1.2
  Top Layer w0.6: D2.2 R13.2
NetD3_1: D3.1 R31.2 SW1.1 | length 14
  Top Layer w0.254: D3.1 -14.254,5.234 ccw(c-12.458,7.03) -12.458,4.49 -9.594,4.49 ccw(c-9.594,7.03) -7.798,5.234 R31.2 -5.189,5.475 ccw(c-5.189,6.923) -4.165,5.899 -2.535,7.529 cw(c-1.975,6.969) SW1.1
NetP1_21: P1.21 R14.2 | length 26.4
  Top Layer w0.35: R14.2 v1(-9.487,22.448)
  Bottom Layer w0.254: v1(-9.487,22.448) -12.827,22.448 cw(c-12.827,24.988) -15.367,24.988 -15.367,32.506 cw(c-14.072,32.506) -14.072,33.801 -7.301,33.801 cw(c-7.301,32.5) P1.21
NetQ1_1: Q1.1 R1.1 | length 1.3
  Top Layer w0.35: Q1.1 -2.661,24.452 R1.1
NetQ2_1: Q2.1 R4.1 | length 1.3
  Top Layer w0.35: Q2.1 -5.951,24.452 R4.1
NetQ3_1: Q3.1 R9.1 | length 1.4
  Top Layer w0.25: Q3.1 R9.1
NetQ4_1: Q4.1 R10.1 | length 1.3
  Top Layer w0.35: Q4.1 -9.24,24.452 R10.1
NetQ5_1: Q5.1 R11.1 | length 1.3
  Top Layer w0.35: Q5.1 -12.53,24.452 R11.1
NetR5_1: R5.1 U1.37 | length 5.7
  Top Layer w0.254: R5.1 cw(c-11.468,20.157) -11.218,20.407 -9.33,18.519 ccw(c-8.306,19.543) -8.306,18.095 U1.37
NetR6_1: R6.1 U1.38 | length 5.4
  Top Layer w0.254: R6.1 cw(c-11.468,18.885) -11.154,19.2 -9.973,18.019 ccw(c-8.949,19.043) -8.949,17.595 U1.38
NetR7_1: R7.1 U1.39 | length 5.2
  Top Layer w0.254: R7.1 cw(c-11.468,17.675) -11.133,18.01 -10.641,17.519 ccw(c-9.618,18.543) -9.618,17.095 U1.39
NetR8_1: R8.1 U1.40 | length 4.9
  Top Layer w0.254: R8.1 ccw(c-10.566,17.871) -10.566,16.595 U1.40
NetR14_1: R14.1 U1.33 | length 2.6
  Top Layer w0.254: R14.1 -7.887,20.706 ccw(c-7.276,20.706) -7.276,20.095 U1.33
NTC1: C1.2 P1.10 R2.1 U1.23 | length 14.1
  Top Layer w0.229: U1.23 -0.34,22.245 cw(c1.108,22.245) 0.084,23.268 2.04,25.224 cw(c3.063,24.2) 3.063,25.648 6.121,25.648 ccw(c6.121,25.931) 6.404,25.931 C1.2 R2.1
  Top Layer w0.4: R2.1 5.156,28.604 cw(c7.696,28.604) 5.9,30.4 P1.10
NTC2: C2.2 P1.12 R3.1 U1.24 | length 10.4
  Top Layer w0.254: U1.24 -0.84,22.354 cw(c0.608,22.354) -0.416,23.378 2.607,26.401 cw(c2.66,26.348) C2.2 R3.1
  Top Layer w0.4: R3.1 3.908,30.278 cw(c4.222,30.278) P1.12
RST: C3.2 U1.7 | length 10.2
  Top Layer w0.2: U1.7 3.252,15.595 cw(c3.252,16.104) 2.743,16.104 2.743,19.263 cw(c4.191,19.263) 3.167,20.287 4.544,21.664 cw(c5.568,20.64) 5.568,22.088 C3.2
RX: J1.1 U1.52 | length 4.6
  Top Layer w0.25: J1.1 -4.788,7.75 ccw(c-4.788,9.198) -3.34,9.198 U1.52
SCK: U1.55 U3.5 | length 17.3
  Top Layer w0.2: U1.55 v1(-1.84,11.999)
  Bottom Layer w0.2: v1(-1.84,11.999) cw(c-1.293,11.999) -1.68,12.386 -0.627,13.438 cw(c0.397,12.415) 0.397,13.862 4.879,13.862 ccw(c4.879,16.74) 6.913,14.705 8.262,16.054 ccw(c7.481,16.834) 8.585,16.834 cw(c9.068,16.834) 9.068,17.317 10.503,17.317 cw(c10.503,15.869) 11.527,16.893 v1(11.62,16.8)
SIN0: P1.22 R5.2 | length 15.2
  Top Layer w0.254: R5.2 cw(c-12.105,21.474) -13.468,21.474 -13.468,26.414 cw(c-12.02,26.414) -13.043,27.438 -12.409,28.072 cw(c-11.455,27.118) -11.455,28.467 -11.103,28.467 ccw(c-11.103,29.335) -10.49,28.721 cw(c-9.938,28.17) -9.938,28.95 -9.488,28.95 ccw(c-9.488,29.904) -8.814,29.229 cw(c-8.569,28.984) -8.569,29.331 -7.769,29.331 ccw(c-7.769,30.779) -6.745,29.755 P1.22
SIN1: P1.24 R6.2 | length 15.4
  Top Layer w0.254: R6.2 cw(c-13.068,19.682) -13.318,19.433 -13.741,19.857 cw(c-13.188,20.41) -13.97,20.41 -13.97,26.632 cw(c-12.668,26.632) -13.589,27.553 -12.52,28.622 cw(c-11.913,28.015) -11.913,28.874 -11.44,28.874 ccw(c-11.44,30.001) -10.643,29.204 cw(c-10.275,28.836) -10.275,29.356 -9.974,29.356 ccw(c-9.974,30.804) -8.951,29.78 -8.231,30.5 P1.24
SIN2: P1.26 R7.2 | length 15.4
  Top Layer w0.254: R7.2 cw(c-13.068,18.534) -13.34,18.262 -14.049,18.971 cw(c-13.026,19.995) -14.473,19.995 -14.473,26.729 cw(c-13.026,26.729) -14.049,27.753 -12.766,29.036 cw(c-12.116,28.386) -12.116,29.306 -11.794,29.306 ccw(c-11.794,30.753) -10.77,29.73 P1.26
SIN3: P1.28 R8.2 | length 15.5
  Top Layer w0.254: R8.2 cw(c-13.068,17.446) -13.406,17.108 -14.552,18.255 cw(c-13.528,19.278) -14.976,19.278 -14.976,26.847 cw(c-13.342,26.847) -14.498,28.002 P1.28
SRV0: P1.30 U1.41 | length 22.8
  Top Layer w0.254: P1.30@-13.998,30.498 ccw(c-10.971,27.157) -15.479,27.157 -15.479,18.153 ccw(c-13.421,18.153) -13.421,16.095 U1.41
SRV1: P1.29 U1.42 | length 25.8
  Top Layer w0.254: P1.29 -14.591,31.909 ccw(c-11.234,28.551) -15.982,28.551 -15.982,17.963 ccw(c-13.614,17.963) -13.614,15.595 U1.42
SRV2: P1.27 U1.43 | length 31.4
  Top Layer w0.254: -12.947,33.447 P1.27 ; -12.947,33.447 ccw(c-13.85,32.544) -13.85,33.821 ccw(c-14.146,31.501) -16.485,31.501 -16.485,17.686 ccw(c-13.894,17.686) -13.894,15.095 U1.43
SRV3: P1.25 U1.44 | length 35.2
  Top Layer w0.254: P1.25 -11.085,33.585 ccw(c-12.881,31.789) -12.881,34.329 -14.034,34.329 ccw(c-14.034,31.375) -16.988,31.375 -16.988,17.519 ccw(c-14.064,17.519) -14.064,14.595 U1.44
SRV4: P1.13 U1.58 | length 56.3
  Top Layer w0.254: U1.58 v1(-0.34,11.618) ; P1.13 5.65,36.15 cw(c7.446,34.354) 7.446,36.894 14.754,36.894 cw(c14.754,33.379) 18.269,33.379 18.269,24.026 cw(c16.821,24.026) 17.845,23.002 v1(17.532,22.689) ; v1@17.481,22.689 v1@17.507,22.715
  Bottom Layer w0.2: v1(-0.34,11.618) 7.837,11.618 ccw(c7.837,17.606) 12.071,13.372 17.28,18.581 ccw(c16.256,19.604) 17.704,19.604 17.704,22.275 ccw(c17.117,22.275) v1(17.532,22.689) ; v1@17.481,22.689 v1@17.499,22.665
SRV5: P1.11 U1.59 | length 52.5
  Top Layer w0.2: U1.59 v1(0.16,12.101)
  Top Layer w0.254: P1.11 7.015,35.515 cw(c8.811,33.719) 8.811,36.259 14.629,36.259 cw(c14.629,33.128) 17.761,33.128 17.761,24.568 cw(c16.313,24.568) 17.337,23.544 v1(16.982,23.189) ; v1@16.931,23.189 v1@16.957,23.215
  Bottom Layer w0.2: v1(0.16,12.101) 7.854,12.101 ccw(c7.854,17.864) 11.929,13.789 16.924,18.784 ccw(c15.9,19.808) 17.348,19.808 17.348,21.717 ccw(c16.559,21.717) 17.117,22.275 cw(c17.443,22.6) 16.982,22.6 v1(16.982,23.189)
SRV6: P1.9 U1.61 | length 48
  Top Layer w0.254: U1.61 v1(1.16,12.583) ; P1.9 8.304,34.804 cw(c10.1,33.008) 10.1,35.548 14.587,35.548 cw(c14.587,32.908) 17.227,32.908 17.227,25.084 cw(c15.78,25.084) 16.803,24.06 v1(16.432,23.689) ; v1@16.382,23.689 v1@16.407,23.714
  Bottom Layer w0.2: v1(1.16,12.583) 8.005,12.583 ccw(c8.005,17.736) 11.649,14.093 16.63,19.074 ccw(c15.816,19.888) 16.967,19.888 16.967,21.542 ccw(c16.36,21.542) 16.789,21.971 cw(c17.651,22.833) 16.432,22.833 v1(16.432,23.689)
SWCLK: J2.1 U1.49 | length 5.6
  Top Layer w0.254: J2.1 ccw(c-8.67,11.156) -8.67,9.875 -5.207,9.875 ccw(c-5.207,10.242) -4.939,9.991 ccw(c-5.177,10.23) -4.84,10.23 U1.49
SWDIO: J2.2 U1.46 | length 8
  Top Layer w0.254: J2.2 -10.207,9.632 cw(c-9.832,10.008) -10.363,10.008 -10.363,12.147 cw(c-8.915,12.147) -8.915,13.595 U1.46
TX: J1.2 U1.51 | length 5.1
  Top Layer w0.25: J1.2 -6.109,8.431 cw(c-5.751,8.072) -5.751,8.579 -4.724,8.579 ccw(c-4.724,9.464) -3.84,9.464 U1.51
Vbat: P1.8 SW1.4 | length 45.1
  Top Layer w0.25: SW1.4 v1(1.975,6.5)
  Top Layer w0.254: P1.8@8,30.41 P1.8
  Bottom Layer w0.3: v1(1.975,6.5) 1.975,8.306 cw(c3.423,8.306) 3.423,9.754 3.769,9.754 ccw(c3.769,11.201) 4.793,10.178 5.342,10.727 cw(c6.365,9.703) 6.365,11.151 9.967,11.151 ccw(c9.967,12.598) 10.99,11.575 17.686,18.27 ccw(c16.662,19.294) 18.11,19.294 18.11,26.181 ccw(c16.662,26.181) 16.662,27.629 8.357,27.629 cw(c8.357,28.874) 7.112,28.874 cw(c8.894,28.874) 7.634,30.134 P1.8
pads on no net: LOGO1. SW1.2 SW1.3 U1.2 U1.3 U1.4 U1.5 U1.25 U1.26 U1.27 U1.28 U1.34 U1.53 U1.54 U1.62

## Polygon pours and split planes (outlines as drawn)
GND on Bottom Layer "Top Layer-GND" (solid, remove dead copper, pour order 3): 18.749,0 -18.75,0 -18.75,37.5 18.75,37.5
GND on Top Layer "Top Layer-GND" (solid, remove dead copper, pour order 0): 18.75,0 -18.75,0 -18.75,37.5 18.75,37.5

## Keep-outs
Keep-Out Layer:
  the board outline again, w0.001

## Other copper
Multi-Layer:
  pour cut-out: 19.126,10.77 6.086,10.77 ccw(c6.086,9.322) 5.062,10.346 3.853,9.136 cw(c2.829,10.16) 2.829,8.712 -3.464,8.712 ccw(c-3.464,7.264) -4.488,8.288 -7.121,5.656 cw(c-7.556,6.091) -7.556,5.475 -10.205,5.475 ccw(c-10.205,4.82) -10.668,5.283 cw(c-10.99,5.606) -10.99,5.15 -13.715,5.15 cw(c-13.715,6.241) -14.486,5.469 -15.324,6.307 ccw(c-16.348,5.283) -16.348,6.731 -21.742,6.731 -21.742,-1.829 19.152,-1.829 19.152,10.693

## Silkscreen, mask and mechanical layers (free items; w line width, h text height)
Top Overlay:
  text "GDC" at -10.16,13.514 h0.8 r270
  text "GTR" at -8.15,8.534 h0.8
  text "Head CTRL 2k23 v2.0.0" at -12.611,0.94 h0.8